# Altium PCB InactivityTracker_rev4_pcituremode.PcbDoc
Units mil, origin at the board's own origin, x right, y up, seen from the top; angles counter-clockwise.
Board outline 2480 x 865 mil, 2 copper layers (Top Layer, Bottom Layer); 68 components, 55 nets, 275 pads, 64 vias.
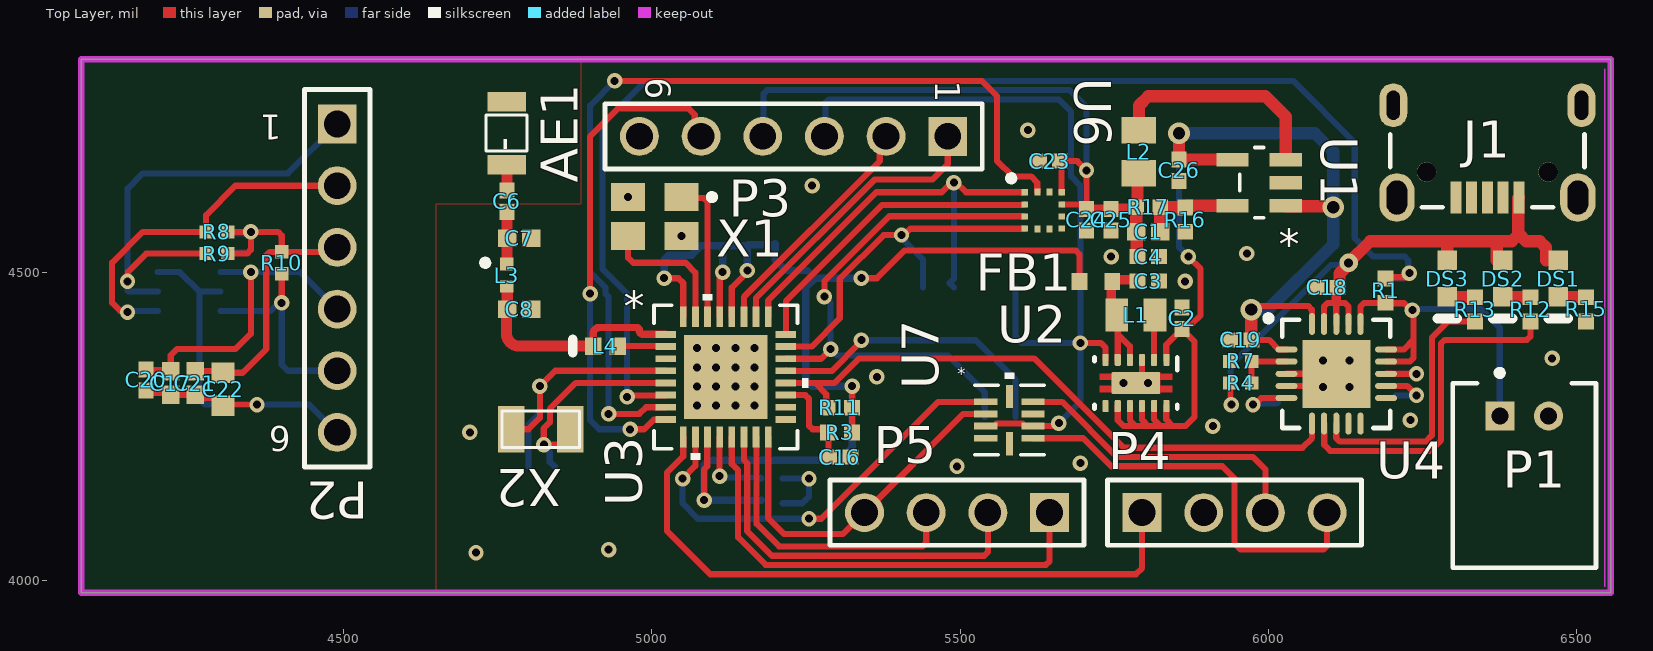
[diagram p0: Top Layer view]
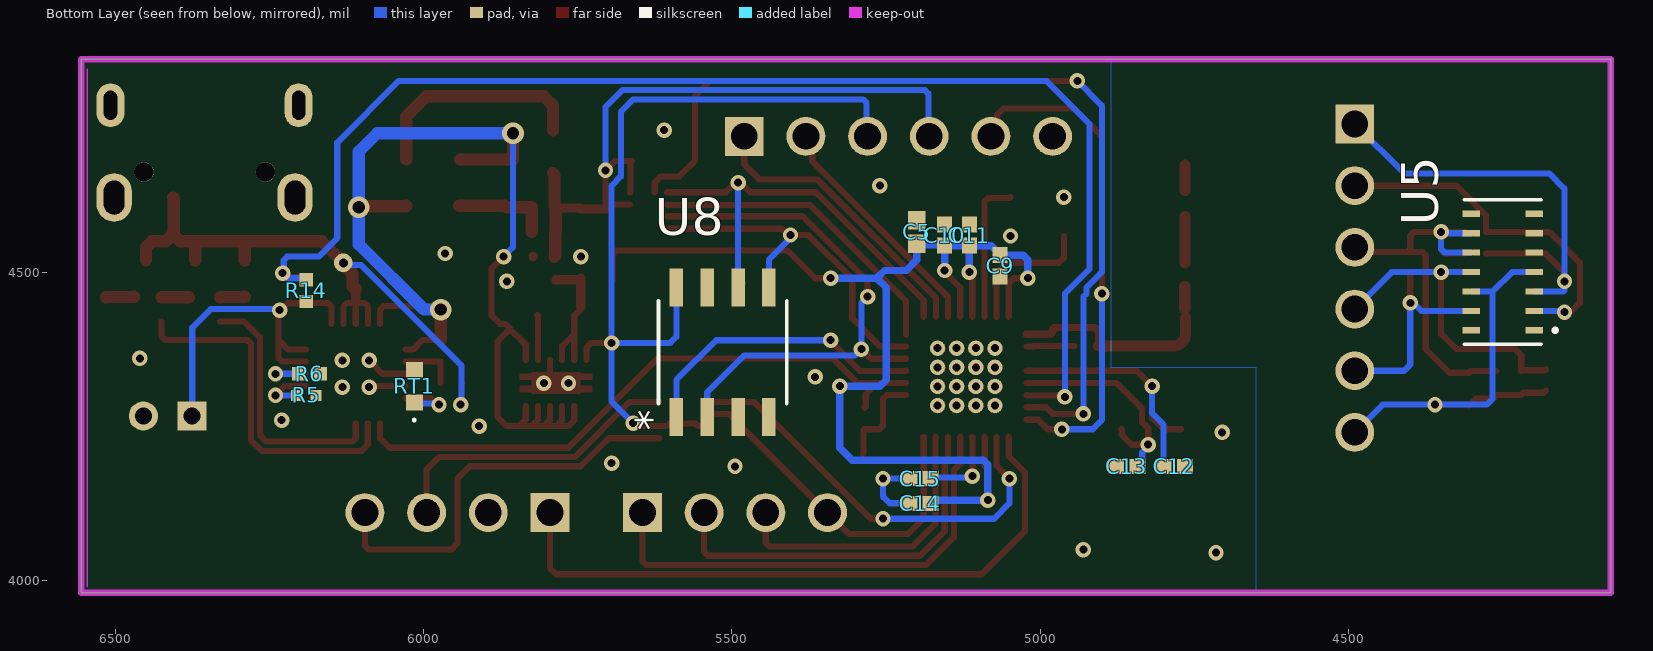
[diagram p1: Bottom Layer view, seen from below]

## Layer stack, top to bottom
Top Solder: solder mask 0.4, Solder Resist, Dk 3.5
Top Layer: signal copper 1.4
Dielectric 1: dielectric 12.6, FR-4, Dk 4.8
Bottom Layer: signal copper 1.4
Bottom Solder: solder mask 0.4, Solder Resist, Dk 3.5

## Board outline
4075,3980 4075,4845 6555,4845 6555,3980
cut-out: 6545,4830 6545,3990
cut-out: 6995,5000

## Design rules (kind name [scope] priority, off if disabled: settings)
Clearance [All] p1: gap=5 ignorepadtopadclearanceinfootprint=TRUE
ComponentClearance [All] p1: gap=6 collisioncheckmode=3 verticalgap=10 showdistances=FALSE
HoleSize [All] p1: absolutevalues=TRUE maxlimit=248.03 minlimit=11.81 maxpercent=80.000 minpercent=20.000
MinimumAnnularRing [All] p1: minimumring=6
MinimumSolderMaskSliver [All] p1 off: minsoldermaskwidth=6
PasteMaskExpansion [All] p1 off: expansion=0
PlaneConnect [All] p1: planeconnectstyle=Direct reliefexpansion=20 reliefentries=4 reliefconductorwidth=10 reliefairgap=10
PolygonConnect [All] p1: connectstyle=Direct reliefconductorwidth=10 reliefentries=4 polygonreliefangle="90 Angle" airgapwidth=10
RoutingVias [All] p1: holewidth=15 width=30 viastyle="Through Hole" minholewidth=11.81 minwidth=8 maxholewidth=248.03 maxwidth=50
SilkToSilkClearance [All] p1: silktosilkclearance=6
SilkToSolderMaskClearance [IsPad] p1: minsilkscreentomaskgap=6 clearancetoexposedcopper=TRUE
SolderMaskExpansion [All] p1 off: expansion=4 istentingtop=FALSE
Width [All] p1: maxlimit=20 minlimit=3 preferedwidth=10
23 further rules are at their usual default settings.

## Components (designator, comment, footprint, x,y, rotation, side; value= is the part's Value field where it differs from the comment)
AE1 "2450AT18B100E" ANT_2450AT18B100E 4765,4725 r90 top
C1 "100pF" CAPC1005X55X25ML05T10 5805,4565 r180 top
C2 "10uF" CAPC1005X55X25NL05T10 5860.16,4425.16 r90 top
C3 "10uF" CAPC1005X55X25NL05T10 5805.16,4485.16 r0 top
C4 "10uF" CAPC1005X55X25NL05T10 5805,4525 r0 top
C5 "2.2uF" CAPC1005X55X25ML05T10 5200,4565 r90 bottom
C6 "12pF" CAPC1005X55X25NL05T10 4765,4615 r270 top
C7 "1.2pF" CAPC1005X55X25ML05T10 4785,4555 r180 top
C8 "1.2pF" CAPC1005X55X25ML05T10 4785,4440 r180 top
C9 "100nF" CAPC1005X55X25NL05T10 5065,4510 r270 bottom
C10 "100nF" CAPC1005X55X25NL05T10 5155,4560 r270 bottom
C11 "100nF" CAPC1005X55X25NL05T10 5115,4560 r270 bottom
C12 "12pF" CAPC1005X55X25NL05T10 4782.68,4185 r0 bottom
C13 "12pF" CAPC1005X55X25NL05T10 4860,4185 r180 bottom
C14 "100nF" CAPC1005X55X25NL05T10 5195,4125 r180 bottom
C15 "1uF" CAPC1005X55X25NL5T10 5195,4165 r0 bottom
C16 "100nF" CAPC1005X55X25NL05T10 5305,4200 r180 top
C17 "0.1uF" CAPC1005X55X25ML05T10 4220,4320 r270 top
C18 "10uF" CAPC1005X55X25NL05T10 6095,4475 r180 top
C19 "4.7uF" CAPC1005X55X25NL05T10 5955,4390 r180 top
C20 "4.7uF" CAPC1005X55X25NL05T10 4180,4325 r270 top
C21 "0.1uF" CAPC1005X55X25ML05T10 4260,4320 r270 top
C22 "10uF" CAPC1608X90X35NL10T15 4305,4310 r270 top
C23 "100nF" CAPC1005X55X25NL05T10 5645,4680 r0 top
C24 "10uF" CAPC1005X55X25NL05T10 5705,4585 r270 top
C25 "100nF" CAPC1005X55X25NL05T10 5745,4585 r90 top
C26 "4.7uF" CAPC1005X55X25NL05T10 5855,4665 r270 top
DS1 "GREEN" LITE-ON-LTST-C190GKT-2_V 6470,4489.53 r270 top
DS2 "GREEN" LITE-ON-LTST-C190GKT-2_V 6380,4489.53 r270 top
DS3 "YELLOW" LITE-ON-LTST-C190GKT-2_V 6290,4489.53 r270 top
FB1 "BLM18HE152SN1D" MURA-BLM18-RF-H4-CHIP-2_V 5720,4485 r0 top
J1 "629105150521" 629105150521 6355,4735 r180 top
L1 "2.2uH" MURA-IND0805_H_0.55_L 5785.16,4430.16 r180 top
L2 "3.3uH" INDC2012X100N 5790,4695 r270 top
L3 "2nH" MURA-IND0402_V 4765,4495 r90 top
L4 "15nH" INDC1005X55X25ML05T10_A 4925,4380 r0 top
P1 "S2B-PH-K-S(LF)(SN)" JST-S2B-PH-K-S_V 6415,4170 r0 top
P2 "61300611121" 61300611121 4490,4490 r270 top
P3 "61300611121" 61300611121 5230,4720 r180 top
P4 "61300411121" 61300411121 5945,4110 r0 top
P5 "61300411121" 61300411121 5495,4110 r180 top
R1 "100K" RESC1005X40X25ML05T05 6190,4470 r90 top
R3 "100k" RESC1005X40X25ML05T05 5305,4240 r0 top
R4 "330k" RESC1005X40X25NL05T05 5955,4320 r0 top
R5 "47k" RESC1005X40X25LL05T05 6190,4300 r180 bottom
R6 "88.7k" RESC1005X40X25NL05T05 6185,4335 r0 bottom
R7 "110k" RESC1005X40X25NL05T05 5955,4355 r180 top
R8 "1K" RESC1005X40X25NL05T05 4295,4565 r0 top
R9 "1K" RESC1005X40X25NL05T05 4295,4530 r0 top
R10 "1K" RESC1005X40X25NL05T05 4400,4515 r270 top
R11 "100k" RESC1005X40X25ML05T05 5305,4280 r0 top
R12 "470" RESC1005X40X25ML05T05 6425,4439.53 r270 top
R13 "470" RESC1005X40X25ML05T05 6335,4439.53 r270 top
R14 "249K" RESC1005X40X25NL05T05 6190,4470 r270 bottom
R15 "470" RESC1005X40X25ML05T05 6515,4439.53 r270 top
R16 "100k" RESC1005X40X25ML05T05 5865,4585 r90 top
R17 "200k" RESC1005X40X25ML05T05 5805,4605 r180 top
RT1 "10k" MURA-NCP18XH103F03RB-2_V 6015,4315 r90 bottom
U1 "SP6669AEK-L/TRR3" SOT-23-5_VAR-AA 5985,4645 r180 top value=Value
U2 "TPS62740DSSR" DSS0012A_V 5785.16,4320.16 r270 top
U3 "CC2640F128RHBT" RHB32_3P45X3P45 5120,4330 r0 top value=Value
U4 "MCP73871-2CCI/ML" QFN-ML20_M 6110,4335 r0 top
U5 "MAX30102EFD+" 21-0880B-L 4250,4500 r0 bottom
U6 "LIS2HH12TR" STM-LGA-12 5635.02,4599.84 r0 top
U7 "DRV2603RUNR" RUN10 5580,4260 r0 top value=Value
U8 "MX25R3235FM1IL0" SOP_8L_150 5515,4370 r90 bottom value=Value
X1 "24.0000Mhz" EPSON-TSX-3225_V 5005,4590 r180 top
X2 "32.768kHz" XTAL320X150X75 4820,4245 r0 top

## Footprints (in the part's own frame and the unit in brackets; to place one, negate y for a bottom-side part, rotate by r counter-clockwise, add the part's x,y. Pads: shape width x height; smd on the part's side, far side on the other; paste and mask are expansions set on the pad)
21-0880B-L [mil]
  rect 28x10 smd paste+0 mask+0: 1(-51,94.49) 2(-51,62.99) 3(-51,31.5) 4(-51,0) 5(-51,-31.5) 6(-51,-62.99) 7(-51,-94.49) 8(51,-94.49) 9(51,-62.99) 10(51,-31.5) 11(51,0) 12(51,31.5) 13(51,62.99) 14(51,94.49)
  silkscreen extent -88,-117 62,117, body extent -57,-112 57,112, height 51
61300411121 [mm] "Pin Header, pitch 2.54 mm, THT, Vertical, single row, 4p"
  rect 1.6x1.6 hole 1.1: 1(-3.81,0)
  round 1.6 hole 1.1: 2(-1.27,0) 3(1.27,0) 4(3.81,0)
  silkscreen extent -5.23,-1.35 5.23,1.35, body extent -5.08,-1.27 5.08,1.27, height 8.57
61300611121 [mm] "Pin Header, pitch 2.54 mm, THT, Vertical, single row, 6p"
  rect 1.6x1.6 hole 1.1: 1(-6.35,0)
  round 1.6 hole 1.1: 2(-3.81,0) 3(-1.27,0) 4(1.27,0) 5(3.81,0) 6(6.35,0)
  silkscreen extent -7.77,-1.35 7.77,1.35, body extent -7.62,-1.27 7.62,1.27, height 8.57
629105150521 [mm] "Micro USB 2.0 SMT Type B Horizontal 5 Contacts High Current"
  rect 0.45x1.3 smd: 1(-1.3,2.9) 2(-0.65,2.9) 3(0,2.9) 4(0.65,2.9) 5(1.3,2.9)
  round 0.8 hole 0.8 unplated: MH1(-2.5,1.85) MH2(2.5,1.85)
  oval 1.15x1.8 hole 0.55 slot 1.2 at 90 deg: Shell(-3.875,-0.9) Shell(3.875,-0.9)
  oval 1.45x2 hole 0.85 slot 1.4 at 90 deg: Shell(-3.725,2.9) Shell(3.725,2.9)
  silkscreen extent -4,0.3 4,3.3, body extent -4,-3.3 4,3.3, height 2.75
ANT_2450AT18B100E [mm]
  rect 0.8x1.6 smd: 1(-1.3,0) 2(1.3,0)
  silkscreen extent -0.73,-0.84 0.75,0.86, body extent -1.6,-0.7 1.6,0.7, height 0.8
CAPC1005X55X25ML05T10 [mm] "Chip Capacitor, 2-Leads, Body 1.00x0.50mm, IPC Low Density"
  rect 0.76x0.72 smd: 1(-0.49,0) 2(0.49,0)
  body extent -0.53,-0.28 0.53,0.27, height 0.55
CAPC1005X55X25NL05T10 [mm] "Chip Capacitor, 2-Leads, Body 1.00x0.50mm, IPC Medium Density"
  rect 0.66x0.62 smd: 1(-0.44,0) 2(0.44,0)
  body extent -0.53,-0.28 0.53,0.27, height 0.55
CAPC1005X55X25NL5T10 [mm] "Chip Capacitor, 2-Leads, Body 1.05x0.55mm, IPC Medium Density"
  rect 0.66x0.62 smd: 1(-0.44,0) 2(0.44,0)
  body extent -0.52,-0.28 0.52,0.27, height 0.55
CAPC1608X90X35NL10T15 [mm] "Chip Capacitor, 2-Leads, Body 1.60x0.80mm, IPC Medium Density"
  rect 0.85x0.95 smd: 1(-0.675,0) 2(0.675,0)
  body extent -0.85,-0.45 0.85,0.45, height 0.9
DSS0012A_V [mm] "SON, 12-Leads, Body 2x3mm, Pitch 0.5mm, Thermal Pad 2x0.9mm, TI Recommended"
  rrect40% 0.5x0.25 smd: 1(-0.95,1.25) 2(-0.95,0.75) 3(-0.95,0.25) 4(-0.95,-0.25) 5(-0.95,-0.75) 6(-0.95,-1.25) 7(0.95,-1.25) 8(0.95,-0.75) 9(0.95,-0.25) 10(0.95,0.25) 11(0.95,0.75) 12(0.95,1.25)
  rrect11% 0.9x2 smd paste-0.45: 13(0,0)
  Top Layer region: -0.375,-1.5 -0.375,-1 -0.45,-1 -0.45,1 -0.375,1 -0.375,1.5 -0.125,1.5 -0.125,1 0.125,1 0.125,1.5 0.375,1.5 0.375,1 0.45,1 0.45,-1 0.375,-1 0.375,-1.5 0.125,-1.5 0.125,-1 -0.125,-1 -0.125,-1.5
  silkscreen extent -1.05,-1.7 1.05,1.7, body extent -1,-1.5 1,1.5, height 0.8
EPSON-TSX-3225_V [mm] "SMD, 4-Leads, Body 3.2x2.5mm"
  rect 1.4x1.15 smd: 1(-1.1,-0.8) 2(1.1,-0.8) 3(1.1,0.8) 4(-1.1,0.8)
  silkscreen extent -2.48,-0.92 -2.23,-0.68, body extent -1.6,-1.25 1.6,1.25, height 0.6
INDC1005X55X25ML05T10_A [mm] "Chip Inductor, 2-Leads, Body 1.05x0.55mm, IPC Low Density"
  rect 0.69x0.72 smd: 1(-0.505,0) 2(0.505,0)
  silkscreen extent -1.35,-0.28 -1.35,0.28, body extent -0.52,-0.28 0.53,0.28, height 0.55
INDC2012X100N [mm]
  rect 1.1x1.42 smd: 1(-0.885,0) 2(0.885,0)
JST-S2B-PH-K-S_V [mm] "THD, 2-Leads, Body 7.6x5.9mm, Pitch 2mm"
  rect 1.2x1.2 hole 0.7: 1(-1,2.45)
  round 1.2 hole 0.7: 2(1,2.45)
  silkscreen extent -2.95,-3.8 2.95,4.35, body extent -2.95,-3.8 2.95,3.8, height 4.8
LITE-ON-LTST-C190GKT-2_V [mm] "Chip, 2-Leads, Body 1.6x0.8mm"
  rect 0.8x0.8 smd: 1(-0.75,0) 2(0.75,0)
  silkscreen extent 1.65,-0.4 1.65,0.4, body extent -0.8,-0.4 0.8,0.4, height 0.8
MURA-BLM18-RF-H4-CHIP-2_V [mm] "Chip Ferrite Bead, 2-Leads, Body 1.6x0.8mm, Height 0.95mm, Reflow"
  rect 0.65x0.7 smd: 1(-0.675,0) 2(0.675,0)
  body extent -0.8,-0.4 0.8,0.4, height 0.95
MURA-IND0402_V [mm] "SMT Inductor, 2 Leads, Body 1x0.5 mm"
  rect 0.525x0.55 smd: 1(0.463,0) 2(-0.462,0)
  silkscreen extent 0.38,0.76 0.63,1.01, body extent -0.5,-0.25 0.5,0.25, height 0.55
MURA-IND0805_H_0.55_L [mm] "Chip Inductor, 2-Leads, Body 2.2x1.45mm, IPC High Density"
  rect 0.93x1.37 smd: 1(-0.785,0) 2(0.785,0)
  body extent -1.1,-0.72 1.1,0.72, height 0.55
MURA-NCP18XH103F03RB-2_V [mm] "Chip, 2-Leads, Body 1.6x0.8mm"
  rect 0.65x0.7 smd: 1(-0.675,0) 2(0.675,0)
  silkscreen extent -1.45,-0.05 -1.35,0.05, body extent -0.8,-0.4 0.8,0.4, height 0.8
QFN-ML20_M [mm] "QFN, 20-Leads, Body 4x4mm, Pitch 0.5mm, Thermal Pad 2.8x2.8mm, IPC Low Density"
  oval 0.9x0.25 smd: 1(-2.05,1) 2(-2.05,0.5) 3(-2.05,0) 4(-2.05,-0.5) 5(-2.05,-1) 11(2.05,-1) 12(2.05,-0.5) 13(2.05,0) 14(2.05,0.5) 15(2.05,1)
  oval 0.25x0.9 smd: 6(-1,-2.05) 7(-0.5,-2.05) 8(0,-2.05) 9(0.5,-2.05) 10(1,-2.05) 16(1,2.05) 17(0.5,2.05) 18(0,2.05) 19(-0.5,2.05) 20(-1,2.05)
  rect 2.8x2.8 smd: 21(0,0)
  silkscreen extent -2.92,-2.22 2.23,2.41, body extent -2.07,-2.07 2.08,2.08, height 1
RESC1005X40X25LL05T05 [mm] "Chip Resistor, 2-Leads, Body 1.00x0.50mm, IPC High Density"
  rect 0.45x0.45 smd: 1(-0.4,0) 2(0.4,0)
  body extent -0.53,-0.27 0.53,0.28, height 0.4
RESC1005X40X25ML05T05 [mm] "Chip Resistor, 2-Leads, Body 1.05x0.55mm, IPC Low Density"
  rect 0.65x0.65 smd: 1(-0.5,0) 2(0.5,0)
  body extent -0.53,-0.28 0.53,0.28, height 0.4
RESC1005X40X25NL05T05 [mm] "Chip Resistor, 2-Leads, Body 1.00x0.50mm, IPC Medium Density"
  rect 0.55x0.55 smd: 1(-0.45,0) 2(0.45,0)
  body extent -0.53,-0.27 0.53,0.28, height 0.4
RHB32_3P45X3P45 [mm]
  rect 0.85x0.28 smd paste-0.14 mask+0: 1(-2.475,1.75) 2(-2.475,1.25) 3(-2.475,0.75) 4(-2.475,0.25) 5(-2.475,-0.25) 6(-2.475,-0.75) 7(-2.475,-1.25) 8(-2.475,-1.75) 17(2.475,-1.75) 18(2.475,-1.25) 19(2.475,-0.75) 20(2.475,-0.25) 21(2.475,0.25) 22(2.475,0.75) 23(2.475,1.25) 24(2.475,1.75)
  rect 0.28x0.85 smd paste-0.14 mask+0: 9(-1.75,-2.475) 10(-1.25,-2.475) 11(-0.75,-2.475) 12(-0.25,-2.475) 13(0.25,-2.475) 14(0.75,-2.475) 15(1.25,-2.475) 16(1.75,-2.475) 25(1.75,2.475) 26(1.25,2.475) 27(0.75,2.475) 28(0.25,2.475) 29(-0.25,2.475) 30(-0.75,2.475) 31(-1.25,2.475) 32(-1.75,2.475)
  rect 3.45x3.45 smd paste-1.712 mask-1.714: 33(0,0)
  round 0.635 hole 0.33: V(-1.181,-1.181) V(-1.181,-0.394) V(-1.181,0.394) V(-1.181,1.181) V(-0.394,-1.181) V(-0.394,-0.394) V(-0.394,0.394) V(-0.394,1.181) V(0.394,-1.181) V(0.394,-0.394) V(0.394,0.394) V(0.394,1.181) V(1.181,-1.181) V(1.181,-0.394) V(1.181,0.394) V(1.181,1.181)
  silkscreen extent -2.96,-3.41 3.41,3.41, body extent -2.63,-2.63 2.63,2.63, height 1.4
RUN10 [mm]
  rect 0.95x0.28 smd paste-0.14: 1(-0.975,0.75) 2(-0.975,0.25) 3(-0.975,-0.25) 4(-0.975,-0.75) 6(0.975,-0.75) 7(0.975,-0.25) 8(0.975,0.25) 9(0.975,0.75)
  rect 0.28x0.95 smd paste-0.14: 5(0,-0.975) 10(0,0.975)
  silkscreen extent -1.43,-1.43 1.43,1.96, body extent -1.1,-1.1 1.1,1.1, height 0.6
SOP_8L_150 [mil]
  rect 62x22 smd paste+0 mask+0: 1(-105,75) 2(-105,25) 3(-105,-25) 4(-105,-75) 5(105,-75) 6(105,-25) 7(105,25) 8(105,75)
  silkscreen extent -84,-104 84,104, body extent 0,0 10,10, height 10
SOT-23-5_VAR-AA [mil]
  rect 52x22 smd mask+0: 1(-43,37.4) 2(-43,0) 3(-43,-37.4) 4(43,-37.4) 5(43,37.4)
  silkscreen extent -7,-57 32,57, body extent 0,0 10,10, height 10
STM-LGA-12 [mm] "LGA, 12-Leads, Body 2x2mm, Pitch 0.5mm"
  rect 0.275x0.25 smd: 1(-0.763,0.75) 2(-0.763,0.25) 3(-0.763,-0.25) 4(-0.763,-0.75) 7(0.763,-0.75) 8(0.763,-0.25) 9(0.763,0.25) 10(0.763,0.75)
  rect 0.25x0.275 smd: 5(-0.25,-0.762) 6(0.25,-0.762) 11(0.25,0.763) 12(-0.25,0.763)
  silkscreen extent -1.45,1.2 -1.2,1.45, body extent -1,-1 1,1, height 1
XTAL320X150X75 [mil]
  rect 43x75 smd: 1(-48,0) 2(48,0)
  silkscreen extent -63,-30 63,30

## Part data
AE1: "JOHANSON TECHNOLOGY - 2450AT18B100E - ANTENNA, CERAMIC, 2.45GHZ", Case/Package=CSMD, Frequency=2.45GHz, Manufacturer=Johanson, Max Frequency=2.5GHz, Max Operating Temperature=85°C, Max Power Dissipation=3W, Min Operating Temperature=-40°C, Package Quantity=1, Supplier Part Number 1=712-1006-1-ND, Bandwidth=100MHz, Category="RF Antennas", ComponentLink1Description=https://datasheet.ciiva.com/24025/antenna-2450at18b100-242422-24025839.pdf?src-supplier=Mouser, ComponentLink1URL=https://datasheet.ciiva.com/24025/antenna-2450at18b100-242422-24025839.pdf?src-supplier=Mouser, ComponentLink2Description=https://datasheet.ciiva.com/1124/1318299-1124918.pdf?src-supplier=Element14, ComponentLink2URL=https://datasheet.ciiva.com/1124/1318299-1124918.pdf?src-supplier=Element14, Contact Plating=Tin, Gain=-0.5dB, Height=0.051inch, Impedance=50R, Length=3.2mm, Manufacturer Part Number=2450AT18B100E, Mount="Surface Mount", Number of Bands=1, Packaging="Tape and Reel", Power Rating=3W, Pricing 1="1=0.56000, 10=0.49500, 25=0.46520, 100=0.37950, 250=0.35252, 500=0.30000, 1000=0.24000 (USD)", Radiation Hardening=No, REACH SVHC="No SVHC", Return Loss=-9.5dB, RoHS=Yes, Stock 1=218439, Supplier 1=Digi-Key, Termination=Solder, Width=1.6mm
C1: library part CMP-2008-04249-1, Manufacturer=Murata, Part Number=GRM1555C1H101GA01D
C2 C3 C4 C18 C24: library part CMP-2008-04556-1, Manufacturer=Murata, Part Number=GRM155R61A105KE15D
C5: library part CMP-2008-04543-1, Manufacturer=Murata, Part Number=GRM155R60J225ME15D
C6 C12 C13: library part CMP-2008-04258-1, Manufacturer=Murata, Part Number=GRM1555C1H120JA01D
C7 C8: library part CMP-2008-04281-1, Manufacturer=Murata, Part Number=GRM1555C1H1R2CA01D
C9 C10 C11 C14 C16 C23 C25: library part CMP-2008-04639-1, Manufacturer=Murata, Part Number=GRM155R71H104KE14D
C15: library part CMP-1662-00020-1, "Chip Capacitor, 1 uF, +/- 10%, 6.3 V, -55 to 85 degC, 0402 (1005 Metric), RoHS, Tape and Reel", Capacitance="1 uF", Case Code (Imperial)=0402, Case Code (Metric)=1005, Max Operating Temperature="85 degC", Min Operating Temperature="-55 degC", Package Quantity=10000, PartNumber=GRM155R60J105KE19D, Tolerance=10%, Type (Capacitors)=X5R, Voltage Rating="6.3 V", Voltage Rating (DC)="3 V", Case/Package=0402, ComponentLink1Description="Manufacturer URL", ComponentLink1URL=http://www.murata.com/, ComponentLink2Description=Datasheet, ComponentLink2URL=http://psearch.en.murata.com/capacitor/product/GRM155R60J105KE19%23.pdf, DatasheetVersion=08/2016, Height="0.5 mm", Length="1 mm", Mount="Surface Mount", Mounting Technology="Surface Mount", PackageDescription="2-Pin Surface Mount Device, Body 1 x 0.5 mm", Packaging="Tape and Reel", Pins=2, Radiation Hardening=No, REACH SVHC="No SVHC", RoHSCompliant=true, Width="0.5 mm"
C17 C21: library part CMP-2100-03641-1, "Chip Capacitor, 0.1 uF, +/- 10%, 16 V, -55 to 125 degC, 0402 (1005 Metric), RoHS, Tape and Reel", Capacitance=100nF, Case Code (Imperial)=0402, Case Code (Metric)=1005, Dielectric=X7R, Dielectric Material=Ceramic, Insulation Resistance=10GR, Manufacturer=Murata, Max Operating Temperature=125degC, Min Operating Temperature=-55degC, Package Description="2-Pin Surface Mount Device, Body 1 x 0.5 mm", Package Quantity=1, Tolerance=10%, Voltage=16V, Case/Package=0402, Datasheet URL=http://psearch.en.murata.com/capacitor/product/GRM155R71C104KA88%23.pdf, Datasheet Version=42675.0, Depth=0.5mm, Height=0.5mm, Lead Free=LeadFree, Length=1mm, Manufacturer URL=http://www.murata.com/, Material=Ceramic, Mount=SurfaceMount, Number of Pins=2, Package Reference=0402, Packaging=TapeandReel, Radiation Hardening=No, REACH SVHC=NoSVHC, RoHSCompliant=true, Termination=SMD/SMT, Thickness=0.022inch, Voltage Rating=16V, Voltage Rating (DC)=16V, Width=0.5mm
C19 C26: library part CMP-2008-03967-1, Manufacturer=Murata, Part Number=GRM155R61C102KA01D
C20: library part CMP-2008-04549-1, Manufacturer=Murata, Part Number=GRM155R60J475ME47D
C22: library part CMP-2006-02792-1, Manufacturer=Murata, Part Number=GRM188R60J106ME47D
DS1 DS2 DS3: library part CMP-2000-05197-1, "LED Uni-Color Green, 75 mW, 5 V, -30 to 85 degC, 2-Pin SMD, RoHS, Tape and Reel", Emitting Color=YellowGreen, Forward Current=30mA, Forward Voltage=2.4V, Manufacturer=Lite-On, Operating Temp Range=-55Cto85C, Operating Temperature Classification=Industrial, Package Description="2-Pin Surface Mount Device, Body 1.6 x 0.8 mm", Package Reference=C190KGKT, Package Type=ChipLed, Power Dissipation=75W, Reverse Voltage=5V, Test Current (It)=20mA, Chip Material=AlGaInP, Datasheet URL=http://datasheet.octopart.com/LTST-C190KGKT-Lite-On-datasheet-43775815.pdf, Datasheet Version=Jul-15, DELETED=Compliant, Dominant Wave Length=571nm, High Brightness=Yes, Lens Dimensions=1.1X0.8X0.52mm, Lum Intensity=35mcd, Luminous Intensity=35mcd, Main Category=ChipLED, Manufacturer URL=http://www.us.liteon.com/, Mounting=SurfaceMount, Number of Elements=1, Packaging=TapeandReel, Peak Wavelength=574nm, Pin Count=2, Product Depth (mm)=0.8mm, Product Height (mm)=0.8mm, Product Length (mm)=1.6mm, Rad Hardened=No, Shape Type=Rectangular, Type=Uni-Color, Viewing Angle=130deg
FB1: library part CMP-0686-00368-2, "Chip Ferrite Bead for GHz Band High-speed Signal Lines, 1500 Ohm, 500 mA, -55 to 125 degC, 1.6 x 0.8 x 0.95 mm SMD, Tape and Reel", DC Resistance="0.50 Ohm Max.", Manufacturer=Murata, Operating Temperature Range="-55 to 125 degC", Rated Current="500 mA", ComponentLink1Description="Manufacturer URL", ComponentLink1URL=http://www.murata.com/, ComponentLink2Description=Datasheet, ComponentLink2URL=http://www.murata.com/products/catalog/pdf/c31e.pdf, ComponentLink3Description="Package Specification", ComponentLink3URL=http://www.murata.com/products/catalog/pdf/c31e.pdf, DatasheetVersion=08/2013, Impedance (at 100 MHz)="1500 Ohm +/- 25%", Mounting Technology="Surface Mount", PackageDescription="2-Pin Chip, Body 1.6 x 0.8 mm", PackageReference=BLM18_H950-2, Packing="Tape and Reel", PartNumber=BLM18HE152SN1D
J1: library part CMP-1502-03252-1, "Micro USB 2.0 Type B Receptacle WR-COM, Horizontal, SMT, with Pegs, High Current at Pin 1 & Pin 5", Contact Resistance=30mOhm, Manufacturer="Wurth Elektronik", Operating Temperature=-40to85degC, Rated Current=3A, Working Voltage=30VAC, Connector Type=MicroUSB2.0TypeB, Datasheet URL=https://katalog.we-online.de/em/datasheet/629105150521.pdf, Gender=Receptacle, Manufacturer URL=http://www.we-online.de, Mounting Technology=SMT, Orientation=Horizontal, Package Reference=629105150521, Packaging=TapeandReel, Part Number=629105150521, Publisher=WurthElektronik
L1: library part CMP-2000-06589-1, "Chip Inductor, 1.0 uH, +/- 20%, -55 to 125 degC, 2-Pin SMD (0805), RoHS, Tape and Reel", Case Size/Dimension=0805, DC Resistance=0.19, Inductance-Nom=1H, Manufacturer=Murata, Package Description="2-Pin Surface Mounted Device, Body 2 x 1.25 mm", Rated Current-Max=800mA, Tolerance (%)=20%, Datasheet URL=https://datasheet.ciiva.com/3866/336lqm21pn1r0mc023-3866307.pdf, Datasheet Version=07/2014, Manufacturer URL=http://www.murata.com/, Mounting Technology=SurfaceMount, Package Reference=0805
L2: library part LQM21PN3R3NGRD, "Inductor with Inductance: 3.3uH Tol. +/-30%, Package: 0805 _2012_", Package="2012 Murata", Digi-Key_Part_Number=490-11718-1-ND, Digi-Key_Purchase_URL=https://www.digikey.com/product-detail/en/murata-electronics/LQM21PN3R3NGRD/490-11718-1-ND/5333558?utm_source=snapeda&utm_medium=aggregator&utm_campaign=symbol, MF=Murata, MP=LQM21PN3R3NGRD, SnapEDA_Link=https://www.snapeda.com/parts/LQM21PN3R3NGRD/Murata%20Electronics%20North%20America/view-part/1523369/?ref=snap
L3: library part CMP-0499-00001-3, "Chip Inductor (Chip Coil) for High Frequency Multilayer, 2 +/- 0.3 nH, 300 mA, 0402 (1005), 180mm Paper Tape", Inductance="2.0 nH +/- 0.3 nH", Inductance Test Frequency="100 MHz", Manufacturer=Murata, Max. Of DC Resistance="0.1 ohm", Operating Temperature Range="-55 to 125 degC", PartNumber=LQG15HS2N0S02D, Rated Current (Itemp) (Based on Temperature rise)="300 mA", Self Resonance Frequency (min.)="6000 MHz", ComponentLink1Description="Manufacturer URL", ComponentLink1URL=http://www.murata.com/, ComponentLink2Description=Datasheet, ComponentLink2URL=http://search.murata.co.jp/Ceramy/image/img/PDF/ENG/L0075S0083LQG15HS.pdf, ComponentLink3Description="Package Specification", ComponentLink3URL=http://search.murata.co.jp/Ceramy/image/img/PDF/ENG/L0075S0083LQG15HS.pdf, Mounting Technology="Surface Mount", PackageDescription="2-Pin SMT Inductor, 1 x 0.5 mm Body", PackageReference=IND0402, Q (min.)=8, Q Test Frequency="100 MHz", RoHS=Yes
L4: library part CMP-2100-03652-1, "Chip Inductor, 15 nH, +/- 5%, 100 MHz, -55 to 125 degC, 0402 (1005 Metric), RoHS, Paper Tape", Case Code (Imperial)=0402, Case Code (Metric)=1005, Current Rating=300mA, DC Resistance (DCR)=320mOhm, Inductance=15nh, Manufacturer=Murata, Max Operating Temperature=125degC, Min Operating Temperature=-55degC, Package Description="2-Pin Surface Mount Device, Body 1 x 0.5 mm", Package Quantity=10000, Self Resonant Frequency=2.5GHz, Test Frequency=100MHz, Tolerance=5%, Case/Package=0402, Core Material=Air, Datasheet URL=http://psearch.en.murata.com/inductor/product/LQG15HS15NJ02_.pdf, Datasheet Version=42675.0, DC Current=300mA, Depth=0.55mm, Height=0.5mm, Height - Seated (Max)=0.022inch, Lead Free=LeadFree, Length=1mm, Manufacturer URL=http://www.murata.com/, Max DC Current=300mA, Military Standard=Not, Package Reference=0402, Packaging=TapeandReel, Q Factor=8, Radiation Hardening=No, RoHSCompliant=true, Shielding=Unshielded, Termination=SMD/SMT, Width=0.02inch
P1: library part CMP-1755-00004-1, "Male Header, Pitch 2 mm, 1 x 2 Position, Height 4.8 mm, Tail Length 3.4 mm, -25 to 85 degC, RoHS, Bulk", Capacitance="10 uF", Case\Package=Radial, Max Operating Temperature="85 degC", Min Operating Temperature="-40 degC", Package Quantity=200, Tolerance=20%, Voltage Rating="50 V", ComponentLink1Description=Datasheet, ComponentLink1URL=http://www.jst-mfg.com/product/pdf/eng/ePH.pdf, DatasheetVersion=Dec-12, Diameter="5 mm", Height="11 mm", Lead Pitch="2 mm", Length="11 mm", Mount="Through Hole", PackageDescription="Male Header, Pitch 2 mm, 1 x 2 Position, Height 4.8 mm, Tail Length 3.4 mm", PackageReference=S2B-PH-K-S, Packaging=Bulk, Pins=2, Radiation Hardening=No, REACH SVHC="No SVHC", RoHSCompliant=true, Voltage Rating (DC)="50 V"
P2 P3: library part CMP-1502-01070-1, "THT Vertical Pin Header WR-PHD, Pitch 2.54 mm, Single Row, 6 pins", Contact Resistance=20mOhm, Manufacturer="Wurth Elektronik", Operating Temperature=-40to105degC, Rated Current=3A, Withstanding Voltage=500VAC, Working Voltage=250VAC, Datasheet URL=https://katalog.we-online.de/em/datasheet/6130xx11121.pdf, Gender=Male, Manufacturer URL=http://www.we-online.de, Mounting Technology=THT, Orientation=Vertical, Package Reference=61300611121, Packaging=Bag, Part Number=61300611121, Pin Number=6, Pitch=2.54mm, Publisher=WurthElektronik, Row Number=Single
P4 P5: library part CMP-1502-01064-1, "THT Vertical Pin Header WR-PHD, Pitch 2.54 mm, Single Row, 4 pins", Contact Resistance=20mOhm, Manufacturer="Wurth Elektronik", Operating Temperature=-40to105degC, Rated Current=3A, Withstanding Voltage=500VAC, Working Voltage=250VAC, Datasheet URL=https://katalog.we-online.de/em/datasheet/6130xx11121.pdf, Gender=Male, Manufacturer URL=http://www.we-online.de, Mounting Technology=THT, Orientation=Vertical, Package Reference=61300411121, Packaging=Bag, Part Number=61300411121, Pin Number=4, Pitch=2.54mm, Publisher=WurthElektronik, Row Number=Single
R1 R3 R11 R16: library part CMP-2002-08123-2, "Chip Resistor, 100 KOhm, +/- 1%, 0.63 W, -55 to 155 degC, 0402 (1005 Metric), RoHS, Tape and Reel", Case Code (Imperial)=0402, Case Code (Metric)=1005, Max Operating Temperature="155 degC", Min Operating Temperature="-55 degC", Package Quantity=10000, Power Rating="63 mW", Resistance="100 kohm", Tolerance=1%, Type (Resistor)="Thick Film", Voltage Rating="50 V", Case\Package=0402, ComponentLink1Description="Manufacturer URL", ComponentLink1URL=http://www.vishay.com/, ComponentLink2Description=Datasheet, ComponentLink2URL=http://www.vishay.com/docs/20035/dcrcwe3.pdf, DatasheetVersion=06/2012, Height="0.35 mm", Length="1 mm", Mount="Surface Mount", Mounting Technology="Surface Mount", PackageDescription="2-Pin Surface Mount Device, Body 1 x 0.5 mm", PackageReference=0402, Packaging="Tape and Reel", Pins=2, Radiation Hardening=No, REACH SVHC=Unknown, RoHSCompliant=true, Weight="2.3E-05 oz", Width="0.5 mm"
R4: library part CMP-2002-08521-1, Manufacturer="Vishay Dale", Part Number=CRCW0402330KFKED
R5: library part CMP-2002-00026-1, Manufacturer="Vishay Dale", Part Number=CRCW040247K0JNED
R6: library part CMP-2002-00251-1, Manufacturer="Vishay Dale", Part Number=CRCW040288K7FKED
R7: library part CMP-2002-08148-1, Manufacturer="Vishay Dale", Part Number=CRCW0402110KFKED
R8 R9 R10: library part CMP-2002-08276-1, Manufacturer="Vishay Dale", Part Number=CRCW04021K00FKED
R12 R13 R15: library part CMP-2002-00023-1, Manufacturer="Vishay Dale", Part Number=CRCW0402470RJNED
R14: library part CMP-2002-08401-1, Manufacturer="Vishay Dale", Part Number=CRCW0402249KFKED
R17: library part CMP-2002-08351-1, Manufacturer="Vishay Dale", Part Number=CRCW0402200RFKED
RT1: library part CMP-2000-05271-1, "NTC Thermistor, 10 KOhm, +/- 1%, 0.1 W, -40 to 125 degC, 0603 (1608 Metric), RoHS, Tape and Reel", Manufacturer=Murata, Rated Current=310A, Resistance=10kO, Temperature Range=-40to+125degC, Tolerance (%)=±1%, B-constant=3434K, Datasheet URL=http://www.jameco.com/Jameco/Products/ProdDS/1870999.pdf, Datasheet Version=Apr-05, Manufacturer URL=http://www.murata.com/, Type=NTC
U1: "Buck Switching Regulator IC Positive Adjustable 0.6V 1 Output 600mA SC-74A, SOT-753", Built_By=EMA_Jessica, Copyright="Copyright (C) 2018 Accelerated Designs. All rights reserved", Manufacturer_Part_Number=SP6669AEK-L/TRR3, RefDes=RefDes, Type=DEV, Vendor=Exar
U2: library part CMP-0323-00572-2, "Step Down Converter For Low Power Applications, 2.2 to 5.5 V VIN, -40 to 85 degC, 12-Pin WSON (DSS), RoHS, Tape and Reel", PartNumber=TPS62740, Temperature Max="85 degC", Temperature Min="-40 degC", ComponentLink1Description="Manufacturer URL", ComponentLink1URL=http://www.ti.com/, ComponentLink2Description=Datasheet, ComponentLink2URL=http://www.ti.com/lit/ds/symlink/tps62740.pdf, ComponentLink3Description="Package Specification", ComponentLink3URL=http://www.ti.com/litv/pdf/mpds336b, DatasheetVersion=SLVSB02B, Mounting Technology="Surface Mount", PackageDescription="12-Pin Plastic Small Outline, Body 3 x 2 mm, Pitch 0.5 mm", PackageReference=DSS0012A, PackageVersion="4209244/C, 07/2011", Packing="Tape and Reel", RoHS=TRUE, VIN Max="5.5 V", VIN Min="2.2 V", VOUT Max="3.3 V", VOUT Min="1.8 V"
U3: "SimpleLink Wireless MCU", Built_By=EMA_Jessica, Copyright="Copyright (C) 2018 Accelerated Designs. All rights reserved", Manufacturer_Part_Number=CC2640F128RHBT, RefDes=RefDes, Type=DEV, Vendor="Texas Instruments"
U4: library part CMP-0133-00005-1, "Stand-Alone System Load Sharing and Li-Ion/Li-Polymer Battery Charge Management Controller, 4.2V, 20-Pin QFN, Industrial Temperature", DatasheetVersion="revB, May-2009", PackageDescription="20-Lead Plastic Quad Flat, No Lead Package (ML) - 4x4x0.9 mm Body [QFN]", PackageReference=QFN-ML20, PackageVersion="revBB, Aug-2009"
U5: "IC SENSOR OXIMETER/HEARTRATE", Manufacturer=Maxim, Max Operating Temperature=85°C, Max Supply Voltage=2V, Min Operating Temperature=-40°C, Min Supply Voltage=1.7V, Supplier Part Number 1=MAX30102EFD+-ND, Category="Decoders, Multiplexers", ComponentLink1Description=http://www.farnell.com/datasheets/2162814.pdf?src-supplier=Farnell, ComponentLink1URL=http://www.farnell.com/datasheets/2162814.pdf?src-supplier=Farnell, ComponentLink2Description=http://www.farnell.com/datasheets/2162814.pdf?src-supplier=Element14, ComponentLink2URL=http://www.farnell.com/datasheets/2162814.pdf?src-supplier=Element14, ComponentLink3Description=https://datasheets.maximintegrated.com/en/ds/MAX30102.pdf?src-supplier=Digi-Key, ComponentLink3URL=https://datasheets.maximintegrated.com/en/ds/MAX30102.pdf?src-supplier=Digi-Key, Manufacturer Part Number=MAX30102EFD+, Number of Pins=14, Pricing 1="1=9.76000, 10=8.81500, 25=8.40520, 100=7.29800, 500=6.35500, 1000=5.53500 (USD)", REACH SVHC="No SVHC", RoHS=Yes, Stock 1=798, Supplier 1=Digi-Key
U6: library part CMP-2000-07462-1, "MEMS Digital Output Motion Sensor: Ultra-Low-Power High-Performance 3-Axis \"Pico\" Accelerometer, 1.71 to 3.6 V, -40 to 85 degC, 12-Pin LGA, RoHS, Tape and Reel", Case\/Package=LGA, Manufacturer=STMicroelectronics, Max Operating Temperature=85degC, Min Operating Temperature=-40degC, Package Description="12-Pin Land Grid Array Package, Body 2 x 2 mm, Pitch 0.5 mm", Package Reference=LGA-12, Bandwidth=400Hz, Contact Plating=Gold, Datasheet URL=http://www.st.com/content/ccc/resource/technical/document/datasheet/c9/16/f2/79/ca/31/47/89/DM00096789.pdf/files/DM00096789.pdf/jcr:content/translations/en.DM00096789.pdf, Datasheet Version="Rev. 5, 12/2015", Lead Free=LeadFree, Manufacturer URL=http://www.st.com/, Mount=SurfaceMount, Mounting Technology=SurfaceMount, Number of Pins=12, Packaging=TapeandReel, RoHSCompliant=true
U7: "Motor Driver Power MOSFET Parallel, PWM 10-QFN (2x2)", Built_By=EMA_UL_Team, Copyright="Copyright (C) 2018 Accelerated Designs. All rights reserved", Manufacturer_Part_Number=DRV2603RUNR, RefDes=RefDes, Type=DEV, Vendor="Texas Instruments"
U8: "FLASH - NOR Memory IC 32Mb (4M x 8) SPI 80MHz 8-SOP", Built_By=EMA_Cory, Copyright="Copyright (C) 2018 Accelerated Designs. All rights reserved", Manufacturer_Part_Number=MX25R3235FM1IL0, RefDes=RefDes, Type=DEV, Vendor=Macronix
X1: library part CMP-2000-07333-1, "MHz Range Crystal, 24 MHz, -40 to 85 degC, 4-Pin SMD, RoHS, Tape and Reel", Frequency=24MHz, Frequency Stability=10PPM, Load Capacitance=9pF, Manufacturer=Epson, Operating Temperature Range=-40Cto+85C, Package / Case=3.2mmx2.5mm, Package Description="4-Pin Surface Mount Device, Body 3.2 x 2.5 mm", Package Reference=TSX-3225, =X1G004001001012, Brand=EpsonTiming, Datasheet URL=https://support.epson.biz/td/api/doc_check.php?dl=brief_FA-238V_en.pdf, Datasheet Version=12/2015, Drive Level=200uW, ESR=40Ohms, Factory Pack Quantity=250, Height=0.6mm, Length=3.2mm, Manufacturer URL=https://www.eea.epson.com/, Mounting Style=SMD/SMT, Mounting Technology=SurfaceMount, Packaging=Reel, Product Category=Crystals, RoHS=True, Series=TSX-3225, Termination Style=SMD/SMT, Tolerance=10PPM, Type=Crystal, Unit Weight=0.000564oz, Width=2.5mm
X2: library part 9HT10-32.768KDZY-T, "TXC - 9HT10-32.768KDZY-T - CRYSTAL, 32.768KHZ, 7PF, 3.2 X 1.5MM", Case/Package=SMD/SMT, ESR (Equivalent Series Resistance)=70kR, Frequency Tolerance=20ppm, Load Capacitance=7pF, Manufacturer=TXC, Max Operating Temperature=85°C, Min Operating Temperature=-40°C, Package Quantity=1, Supplier Part Number 1=887-1506-1-ND, Category=Crystals, ComponentLink1Description=https://datasheet.ciiva.com/856/9ht10-856052.pdf?src-supplier=Digi-Key, ComponentLink1URL=https://datasheet.ciiva.com/856/9ht10-856052.pdf?src-supplier=Digi-Key, ComponentLink2Description=https://datasheet.ciiva.com/856/9ht10-856053.pdf?src-supplier=Digi-Key, ComponentLink2URL=https://datasheet.ciiva.com/856/9ht10-856053.pdf?src-supplier=Digi-Key, ComponentLink3Description=https://datasheet.ciiva.com/8047/9ht10-8047909.pdf?src-supplier=Element14, ComponentLink3URL=https://datasheet.ciiva.com/8047/9ht10-8047909.pdf?src-supplier=Element14, ComponentLink4Description=https://datasheet.ciiva.com/856/9ht10-856054.pdf?src-supplier=Digi-Key, ComponentLink4URL=https://datasheet.ciiva.com/856/9ht10-856054.pdf?src-supplier=Digi-Key, Frequency=32.768kHz, Height=0.033inch, Lead Free="Lead Free", Length=0.126inch, Manufacturer Part Number=9HT10-32.768KDZY-T, Mount="Surface Mount", Number of Pins=2, Packaging="Tape and Reel", Pricing 1="1=0.66000, 10=0.55000, 50=0.49500, 100=0.44000, 500=0.41800, 1000=0.35200 (USD)", REACH SVHC="No SVHC", RoHS=Yes, Stock 1=3909, Supplier 1=Digi-Key, Termination=SMD/SMT, Tolerance=20ppm, Width=1.5mm

## Via types
v1: diameter 25, hole 13, Top Layer to Bottom Layer, 60 vias
v2: diameter 35, hole 20, Top Layer to Bottom Layer, 3 vias
v3: diameter 30, hole 15, Top Layer to Bottom Layer, 1 vias

## Nets (pads, with @x,y where several pads share a name; then routed paths per layer and width w, separated by ;. In a path a pad name is that pad's centre, name@x,y a point inside that pad or via, vN(x,y) a via of type N, cw(c..) or ccw(c..) an arc to the next point about the centre after c; other vN are vias at no path point)
GND: C2.2 C3.2 C4.2 C5.2 C7.1 C8.1 C9.2 C10.1 C11.1 C12.1 C13.1 C14.1 C15.2 C16.1 C18.2 C19.2 C23.1 C24.2 C25.1 C26.2 J1.5 J1.Shell P1.2 P3.6 P4.2 R5.2 R6.1 R7.2 R14.2 R15.2 R16.1 RT1.2 U1.2 U2.3 U2.13 U3.17 U3.18 U3.33 U3.V U4.3 U4.4 U4.9 U4.10 U4.11 U4.21 U6.5 U6.6 U6.7 U6.8 U7.5 U7.8 U7.10 U8.4 X1.2 X1.4 | length 288.5
  Top Layer w10: U2.13 5795,4330 U2.3 ; U4.4 6086.38,4315.31 v1(6088.35,4313.35) ; U4.3 6066.69,4335 v1(6088.35,4356.65)
  Top Layer w15: C4.2 C4.2@5822.4,4524.92
  Bottom Layer w10: C14.1 5244.14,4125 5250,4130.86 5255,4135.86 v1(5255,4165) C15.2
  other v1: 4715,4045 4930,4050 5495,4185 5695,4190 4705,4240 5910,4250 6230,4260 6131.65,4313.35 5765,4320 5805,4320 5365,4330 6131.65,4356.65 6460,4360 5865,4485 5745,4525 5965,4530 5048.31,4558.5 4961.69,4621.5 5260,4640 5610,4730
NetAE1_1: AE1.1 C6.1 | length 41.5
  Top Layer w18: C6.1 AE1.1
NetC1_1: C1.1 R16.2 R17.1 U1.5 | length 158.8
  Top Layer w20: C1.1 5824.49,4565.2 5824.49,4604.8 R17.1 5824.84,4604.84 5864.84,4604.84 R16.2 5867.91,4607.6 U1.5
NetC6_2: C6.2 C7.2 L3.1 | length 75.3
  Top Layer w18: L3.1@4765,4515 4765,4550 C6.2@4765,4590.31
NetC8_2: C8.2 L3.2 L4.1 U3.1 | length 363.7
  Top Layer w12: L3.2 cw(c4765,4476.08) L3.2@4765.71,4476.08 ; L4.1 4905.12,4400.12 cw(c4915,4400.12) 4915,4410 4975,4410 cw(c4975,4405) 4980,4405 ccw(c4986.1,4405) 4986.1,4398.9 U3.1
  Top Layer w18: 4764.29,4425 4764.29,4400.71 ccw(c4785,4400.71) 4785,4380 L4.1 ; C8.2 L3.2@4765.71,4476.08
NetC12_2: C12.2 U3.4 X2.1 | length 457.9
  Top Layer w10: X2.1 4800,4245 4818.56,4263.56 v1(4818.56,4315.1) 4843.46,4340 5022.4,4340 U3.4
  Bottom Layer w10: C12.2 4800,4252.29 4818.56,4270.85 v1(4818.56,4315.1)
NetC13_2: C13.2 U3.5 X2.2 | length 368.3
  Top Layer w10: X2.2 4868,4236.5 4851.5,4220 v1(4825,4220) 4825,4246.35 4835,4256.35 4835,4278.07 4877.09,4320.16 U3.5
  Bottom Layer w10: v1(4825,4220) 4825,4217.29 4834.68,4207.61 4834.68,4192.2 4841.89,4185 C13.2
NetC15_1: C15.1 U3.12 | length 140
  Top Layer w10: U3.12 5110,4232.4 v1(5110,4169.06) v1@5115,4164.06
  Bottom Layer w10: v1(5110,4169.06) 5112.03,4167.03 5175.65,4167.03 C15.1
NetC16_2: C16.2 R3.1 U3.19 | length 157.5
  Top Layer w10: U3.19 5249.14,4300.47 5255,4294.61 5255,4250.86 5260.86,4245 5285.31,4245 5286.5,4243.82 5286.5,4206.18 C16.2@5287.68,4205
NetC17_1: C17.1 C20.1 P2.4 U5.11 | length 525.3
  Top Layer w10: C20.1 4181.52,4340.81 4218.48,4340.81 C17.1 4220,4365 4230,4375 4325,4375 4350,4400 v1(4350,4500)
  Bottom Layer w10: U5.11 v1(4350,4500) 4430,4500 P2.4
NetC17_2: C17.2 C20.2 C21.2 C22.2 P2.6 U5.4 U5.12 | length 726
  Top Layer w10: C20.2 4183.48,4304.19 4216.52,4304.19 C17.2 C21.2 4265.55,4295.16 4293.27,4295.16 C22.2 4306.57,4285 v1(4360,4285)
  Bottom Layer w10: U5.4 4235,4500 4266.5,4468.5 ; U5.12 4266.5,4468.5 ; P2.6 4445,4285 v1(4360,4285) 4275.71,4285 4266.5,4294.21 4266.5,4468.5
NetC21_1: C21.1 C22.1 P2.3 R8.2 R9.2 R10.1 U5.9 U5.10 | length 718.2
  Top Layer w10: C21.1 4302.28,4339.29 C22.1 4336.57,4336.57 4375,4375 4375,4526.86 4380.86,4532.72 R10.1 ; R9.2 4344.14,4530 4350,4535.86 v1(4350,4565) ; R8.2 v1(4350,4565) ; P2.3 4482.72,4532.72 R10.1 ; v1(4350,4565) 4394.14,4565 4400,4559.14 R10.1
  Bottom Layer w10: U5.10 4344.14,4531.5 4350,4537.35 v1(4350,4565) 4347.99,4562.99 U5.9
NetDS1_2: DS1.2 R15.1 | length 45.3
  Top Layer w20: DS1.2 6470.39,4459.61 6514.61,4459.61 R15.1
NetDS2_2: DS2.2 R12.1 | length 45.3
  Top Layer w10: DS2.2 DS2.2@6380.79,4459.21
  Top Layer w20: DS2.2@6380.79,4459.21 R12.1
NetDS3_2: DS3.2 R13.1 | length 40.3
  Top Layer w20: DS3.2 6290.39,4459.61 6329.61,4459.61 R13.1@6330,4459.21
NetL1_1: L1.1 U2.2 | length 73.2
  Top Layer w10: U2.2 5814.69,4428.78 L1.1
NetL2_1: L2.1 U1.3 | length 367.6
  Top Layer w20: L2.1 5790,4770 5805,4785 5995,4785 6028,4752 U1.3
NetL4_2: L4.2 U3.2 | length 78
  Top Layer w10: L4.2 5010.55,4380 5011.34,4379.21 U3.2
NetP2_1: P2.1 R9.1 U5.3 | length 752.8
  Top Layer w10: v1(4150,4485) 4150,4500 4180,4530 R9.1
  Bottom Layer w10: U5.3 4151.5,4468.5 4150,4470 v1(4150,4485) 4150,4635 4175,4660 4410,4660 P2.1
NetP2_2: P2.2 R8.1 U5.2 | length 578.8
  Top Layer w10: v1(4150,4435) 4148.09,4436.91 4138.09,4436.91 4125,4450 4125,4515 4175,4565 R8.1 4277.28,4592.28 4325,4640 P2.2
  Bottom Layer w10: v1(4150,4435) 4152.71,4435 4154.71,4437.01 U5.2
NetP2_5: P2.5 R10.2 U5.13 | length 341.4
  Top Layer w10: v1(4400,4450) R10.2
  Bottom Layer w10: U5.13 4382.01,4437.01 4392.13,4447.13 4393.07,4447.13 4395,4449.06 v1@4395,4450 ; v1(4400,4450) 4400,4350 4410,4340 P2.5
NetP3_1: P3.1 U3.26 | length 476.2
  Top Layer w10: U3.26 5169.23,4458.01 5361.21,4650 5455,4650 5480,4675 P3.1
NetP3_2: P3.2 U3.27 | length 388
  Top Layer w10: U3.27 5149.53,4459.53 5369.86,4679.86 5369.86,4709.86 P3.2
NetP3_5: P3.5 U3.8 | length 827.4
  Top Layer w10: v1(4900,4465) 4900,4720 4945,4765 5060,4765 5069.86,4755.14 5069.86,4730.14 P3.5 ; v1(4965,4245) 4987.62,4245 5003.21,4260.59 5022.05,4260.59 U3.8
  Bottom Layer w10: v1(4900,4465) 4900,4260 4915,4245 v1(4965,4245)
NetP4_1: P4.1 U3.9 | length 1065.6
  Top Layer w10: U3.9 5051.09,4201.09 5025,4175 5025,4080 5095,4010 5785,4010 5795,4020 P4.1@5795,4119.13
NetP4_3: P4.3 U7.9 | length 490.5
  Top Layer w10: U7.9 5665.47,4289.53 5755,4200 5975,4200 5995,4180 P4.3@5995,4111.46
NetP4_4: P4.4 U7.6 | length 669.4
  Top Layer w10: U7.6 5699.53,4230.47 5745,4185 5925,4185 5945,4165 5945,4060 5955,4050 6089.14,4050 6095,4055.86 P4.4
NetP5_1: P5.1 U3.13 | length 771
  Top Layer w10: U3.13 5129.85,4188.85 5140,4178.69 5140,4070 5185,4025 5639.14,4025 5645,4030.86 P5.1@5645,4108.99
NetP5_2: P5.2 U3.14 | length 629.9
  Top Layer w10: U3.14 5149.53,4195.47 5155,4190 5155,4080 5195,4040 5539.14,4040 5545,4045.86 P5.2@5545,4111.94
NetP5_3: P5.3 U3.15 | length 484.1
  Top Layer w10: U3.15 5169.74,4232.05 5169.74,4216.87 5170,4216.61 5170,4091.62 5206.62,4055 5439.14,4055 5445,4060.86 P5.3@5445,4111.13
NetP5_4: P5.4 U3.16 U7.2 | length 575.7
  Top Layer w10: U3.16 5188.91,4101.09 5215,4075 5310,4075 P5.4 5504.84,4269.84 U7.2
NetR1_2: R1.2 R14.1 U3.6 | length 2178.8
  Top Layer w10: v1(4960,4297.66) 4962.3,4299.96 5022.05,4299.96 U3.6 ; R1.2 6191.83,4491.52 6231.52,4491.52 v1@6233.35,4493.35
  Bottom Layer w10: v1(4960,4297.66) 4960,4465 4920,4505 4920,4740 4990,4810 6040,4810 6140,4710 6140,4555 6170,4525 6220.94,4525 6226.8,4519.14 6226.8,4499.89 v1(6228.35,4498.35) 6220,4490 6192.28,4490 R14.1
NetR4_2: R4.2 R7.1 U4.2 | length 91.7
  Top Layer w10: R4.2 R7.1 5972.95,4354.76 6029.21,4354.76 U4.2
NetR5_1: R5.1 U4.12 | length 89.9
  Top Layer w10: U4.12 6224.69,4315.31 v1(6240,4300)
  Bottom Layer w10: R5.1 v1(6240,4300)
NetR6_2: R6.2 U4.13 | length 86.8
  Top Layer w10: U4.13 6239.86,4335 v1(6240.05,4334.82)
  Bottom Layer w10: R6.2 6239.86,4335 v1(6240.05,4334.82)
NetR11_1: R11.1 U3.20 U4.6 | length 1008.6
  Top Layer w10: U3.20 5264.84,4320.16 ; R11.1@5285.16,4279.84 5283.06,4281.94 5283.06,4301.94 5264.84,4320.16 ; U4.6 6070.63,4230.63 6055,4215 5765,4215 5620,4360 5336.21,4360 5296.37,4320.16 5264.84,4320.16
NetR12_2: R12.2 U4.7 | length 566
  Top Layer w10: U4.7 6090.39,4254.21 6090.39,4219.61 6100,4210 6262.53,4210 6280,4227.47 6280,4384.14 6285.86,4390 6419.14,4390 6425,4395.86 R12.2
NetR13_2: R13.2 U4.8 | length 419.4
  Top Layer w10: U4.8 6110,4230.86 6115.86,4225 6255,4225 6265,4235 6265,4393.38 6291.54,4419.92 6329.92,4419.92 R13.2@6330,4419.84
NetRT1_1: RT1.1 U4.5 | length 100.1
  Top Layer w10: v1(5975,4285) 5977.71,4285 5988.34,4295.63 U4.5
  Bottom Layer w10: v1(5975,4285) 5976.71,4286.71 6013.29,4286.71 RT1.1
NetU3_7: U3.7 U6.12 | length 1496.1
  Top Layer w10: v1(4930,4270) 4980,4270 4990.79,4280.79 U3.7 ; v1(4940,4810) 5535,4810 5560,4785 5560,4680 5585,4655 5615,4655 5625.17,4644.83 U6.12
  Bottom Layer w10: v1(4930,4270) 4930,4460 4925,4465 4925,4475 4900,4500 4900,4770 v1(4940,4810)
NetU3_10: U3.10 U7.1 | length 696.6
  Top Layer w10: v1(5050,4165) 5070.77,4185.77 U3.10 ; v1(5255,4100) 5275,4100 5464.53,4289.53 U7.1
  Bottom Layer w10: v1(5050,4165) 5050,4125 5075,4100 v1(5255,4100)
NetU3_21: U3.21 U8.1 | length 481.2
  Top Layer w10: U3.21 5217.78,4339.5 5291.79,4339.5 5340,4387.71 v1(5340,4389.53)
  Bottom Layer w10: v1(5340,4389.53) 5525.47,4389.53 5590,4325 U8.1
NetU3_22: U3.22 U6.3 U8.2 | length 881
  Top Layer w10: U3.22 5274.53,4359.53 v1(5290,4375) ; v1(5280,4460) 5280,4485 5385.5,4590.5 5604.5,4590.5 U6.3
  Bottom Layer w10: v1(5280,4460) 5285.47,4454.53 5290,4450 v1(5290,4375) 5300.5,4364.5 5480.5,4364.5 5540,4305 U8.2
NetU3_23: U3.23 U6.4 U8.5 | length 603.6
  Top Layer w10: U3.23 5259.21,4379.21 5305,4425 5305,4488.79 5376.21,4560 5409.06,4560 5419.37,4570.31 U6.4
  Bottom Layer w10: v1(5405,4560) 5405,4555 5440,4520 U8.5
NetU3_24: U3.24 U6.2 | length 506.2
  Top Layer w10: U3.24 5217.44,4452.44 5373.87,4608.87 5604.19,4608.87 U6.2
NetU3_25: U3.25 U6.1 U8.6 | length 703.9
  Top Layer w10: U3.25 5188.91,4453.91 5364.37,4629.37 5470.31,4629.37 5485.94,4645 v1(5490,4645) 5494.06,4645 5509.69,4629.37 U6.1
  Bottom Layer w10: U8.6 5483.07,4481.93 5490,4488.86 v1(5490,4645)
NetU3_30: U3.30 X1.1 | length 231.9
  Top Layer w10: X1.1 5049.8,4620 5084.61,4620 5090.47,4614.14 U3.30
NetU3_31: U3.31 X1.3 | length 226
  Top Layer w10: X1.3 4961.69,4523.31 4970,4515 5055,4515 5070.77,4499.23 U3.31
V_1V8: C1.2 C4.1 C23.2 C24.1 C25.2 L2.2 P3.4 R17.2 U6.9 U6.10 | length 1135.6
  Top Layer w10: U6.9 5697.8,4609.69 C24.1@5705,4602.48 ; U6.10 5664.7,4629.37 5664.63,4629.45 5664.63,4677.7 C23.2 5690,4680 v1(5705,4665) C24.1@5705,4602.48 ; C24.1 C24.1@5705,4602.48 ; C25.2 C25.2@5746.34,4603.66 ; R17.2@5783.98,4603.66 R17.2
  Top Layer w15: C24.1 C25.2 ; C25.2@5746.34,4603.66 R17.2@5783.98,4603.66
  Top Layer w20: C4.1 5786.69,4525.98 5786.69,4564.02 C1.2 5785.51,4565.2 5785.51,4604.8 R17.2 5787.66,4607.34 5787.66,4657.81 L2.2
  Bottom Layer w10: P3.4 5181.5,4721.5 5181.5,4789.14 5187.35,4795 5677.53,4795 5705,4767.53 v1(5705,4665)
V_3V3: P3.3 U2.6 U7.3 U7.7 U8.8 | length 1366.5
  Top Layer w10: U7.3 5554.8,4250.16 5558.98,4254.33 5601.02,4254.33 5605.2,4250.16 5652.45,4250.16 5657.29,4255 v1(5660,4255) ; v1(5695,4385) 5728.17,4385 5735.94,4377.23 U2.6
  Bottom Layer w10: P3.3 5281.5,4721.5 5281.5,4774.14 5287.35,4780 5660,4780 5680,4760 5680,4655 5695,4640 v1(5695,4385) ; U8.8 5590,4395 5600,4385 v1(5695,4385) ; v1(5660,4255) 5695,4290 v1(5695,4385)
V_BAT: P1.1 R1.1 U4.14 U4.15 U4.16 | length 585.4
  Top Layer w10: U4.16 6149.45,4415.79 6149.45,4444.14 6155.31,4450 6189.69,4450 R1.1 6190.85,4449.47 6219.99,4449.47 6231.11,4438.35 v1(6233.35,4438.35) ; U4.14 6229.14,4354.69 6235,4360.54 6235,4390 ; U4.15 6219.37,4374.37 6235,4390 ; v1@6235,4430 6235,4390
  Bottom Layer w10: v1(6233.35,4438.35) 6235,4440 6345,4440 6375,4410 6375,4267.09 P1.1
V_MCU: C3.1 FB1.2 L1.2 U2.4 U2.5 | length 226.6
  Top Layer w10: L1.2@5745,4439.41 5755.63,4428.78 5755.63,4399.37 ; FB1.2@5745,4490 FB1.2@5747.42,4487.58 ; U2.5 5755.63,4399.37 ; U2.4 5775.31,4379.69 5755.63,4399.37 ; C3.1@5785.41,4487.58 C3.1
  Top Layer w15: L1.2@5745,4444.41 5745,4481.57 FB1.2@5745,4490 ; FB1.2@5747.42,4487.58 C3.1@5785.41,4487.58
V_SYS: C2.1 C19.1 C26.1 U1.1 U1.4 U2.1 U2.8 U2.9 U2.10 U2.11 U2.12 U4.1 U4.20 | length 1890.7
  Top Layer w10: U2.8 5755.63,4259.69 5765.16,4250.16 5785.16,4250.16 ; U2.9 5775.31,4260 5785.16,4250.16 ; U2.10 5795,4260.31 5805.16,4250.16 ; U2.11 5814.69,4260.63 5825.16,4250.16 ; U2.12 5834.37,4260.94 5845.16,4250.16 ; U2.1 5834.37,4382.05 5852.17,4399.84 5852.95,4399.84 C2.1@5860.16,4407.05 ; v1(5870,4525) 5890,4505 5890,4430 5875.83,4415.83 5867.36,4415.83 5860.16,4408.62 C2.1 C2.1@5860.16,4407.05 ; C19.1 6001.02,4390 6016.65,4374.37 U4.1 ; v2(5972.32,4439.14) 5979.09,4439.14 5984.95,4445 6064.69,4445 6070.55,4439.14 6070.55,4415.79 U4.20 ; 5785.16,4250.16 5805.16,4250.16 ; 5805.16,4250.16 5825.16,4250.16 ; 5825.16,4250.16 5845.16,4250.16 ; 5845.16,4250.16 5865.16,4250.16 5880.16,4265.16 5880.16,4387.05 C2.1@5860.16,4407.05
  Top Layer w20: C26.1 v2(5855,4725) ; C26.1@5865,4682.32 5865.04,4682.36 5940.96,4682.36 U1.4@5941,4682.4 ; C19.1 v2(5972.32,4439.14) ; U1.1 6029,4606.6 6103.4,4606.6 v2(6105,4605)
  Bottom Layer w10: v2(5855,4725) 5855,4540 v1(5870,4525)
  Bottom Layer w20: v2(5855,4725) 6075,4725 6105,4695 v2(6105,4605) 6105,4545 5999.32,4439.32 5972.5,4439.32 v2(5972.32,4439.14)
V_USB: C18.1 DS1.1 DS2.1 DS3.1 J1.1 R4.1 U4.17 U4.18 U4.19 | length 1064
  Top Layer w10: R4.1 5938.64,4318.64 5938.64,4286.36 v1(5940,4285) ; U4.19 6090.31,4444.14 6096.17,4450 6110,4450 ; U4.18 6110,4450 ; C18.1 C18.1@6113.15,4475.83 ; U4.17 6129.69,4444.14 6123.83,4450 6110,4450
  Top Layer w15: 6110,4450 C18.1@6110,4472.32
  Top Layer w20: C18.1@6110,4472.8 6110.91,4472.8 6115.31,4477.2 6115.31,4497.61 6129.82,4512.12 v3(6129.82,4514.82) ; v3@6130,4515 6165,4550 6290,4550 ; DS3.1 6290,4550 ; DS2.1@6370,4519.06 6370,4545 6365,4550 ; J1.1 6405.04,4619.69 6405.04,4597.76 6405,4597.72 6405,4560.53 ; 6450,4519.06 6450,4540 6440,4550 6417.9,4550 6406.18,4561.72 6405,4560.53 ; 6290,4550 6365,4550 ; 6365,4550 6394.47,4550 6405,4560.53
  Bottom Layer w10: v1(5940,4285) 5938.64,4286.36 5938.64,4348.64 6101.29,4511.29 6126.29,4511.29 v3(6129.82,4514.82)
VDDR: C5.1 C9.1 C10.2 C11.2 C14.2 FB1.1 R3.2 R11.2 U3.11 U3.28 U3.29 U3.32 | length 2080.7
  Top Layer w10: v1@5021.91,4488.09 v1(5020,4490) 5043.31,4490 5051.09,4482.23 U3.32 ; v1(5085,4130) 5085,4180 5090,4185 5090,4232.09 U3.11 ; U3.29 5110.15,4491.1 5115,4495.94 v1(5115,4500) ; U3.28 5129.85,4474.85 5155,4500 v1(5155,4502.5) ; R3.2@5324.69,4245 R11.2 5324.84,4280.16 5324.84,4314.84 v1(5325,4315) ; v1(5340,4490) 5365,4490 5410,4535 5687.57,4535 5693.43,4529.14 FB1.1
  Bottom Layer w12: v1(5020,4490) 5020,4520 5027.32,4527.32 C9.1 5065,4528.11 5079.57,4542.68 C11.2 ; v1@5084.06,4130 C14.2@5177.68,4130 ; v1(5085,4130) 5085,4187.97 5092.03,4195 5305,4195 5325,4215 v1(5325,4315) 5260,4315 5250,4325 5250,4475 5265,4490 ; v1(5115,4500) C11.2 ; v1(5155,4502.5) C10.2 ; v1(5340,4490) 5265,4490 ; C11.2 C10.2 ; C10.2 5156.52,4544.19 5198.48,4544.19 C5.1 5200,4520 5217.5,4502.5 5252.5,4502.5 5265,4490
pads on no net: AE1.2 J1.2 J1.3 J1.4 J1.MH1 J1.MH2 U2.7 U3.3 U5.1 U5.5 U5.6 U5.7 U5.8 U5.14 U6.11 U7.4 U8.3 U8.7

## Polygon pours and split planes (outlines as drawn)
GND on Bottom Layer "NONET_L02_P010" (solid, remove dead copper, shelved, pour order 10): 6555,4845 6555,3980 4650,3980 4650,4345 4885,4345 4885,4845
GND on Top Layer "Top Layer-GND1" (solid, shelved, pour order 13): 4650,3980 6555,3980 6555,4845 4885,4845 4885,4610 4650,4610

## Keep-outs
Keep-Out Layer:
  the board outline again, w10

## Text inside footprints (layer, text, board x,y; h text height)
FB1: Mechanical 6 "Land Pattern Adapted for Reflow Soldering" at 5680.63,4508.62 h1.97
J1: Mechanical 2 "PCB Edge" at 6406.18,4864.92 h16 r180
P2: Top Overlay "1" at 4400,4755 h40 r180; Top Overlay "6" at 4415,4250 h40 r180
P3: Top Overlay "6" at 4990,4815 h40 r270; Top Overlay "1" at 5460,4810 h40 r270
U1: Top Overlay "*" at 6050.5,4590.6 h50 r180; Mechanical 13 "*" at 6050.5,4590.6 h50 r180; Mechanical 7 "0.024in/0.61mm" at 6115.5,4822 h25 r180; Mechanical 7 "0.075in/1.9mm" at 5822,4657.5 h25 r180; Mechanical 7 "0.037in/0.95mm" at 6323,4638.8 h25 r180; Mechanical 7 "0.114in/2.896mm" at 5633.5,4657.5 h25 r180; Mechanical 7 "0.11in/2.794mm" at 6072.5,4418 h25 r180; Mechanical 7 "0.063in/1.6mm" at 6066.25,4493 h25 r180; Mechanical 7 "Alt 2 Padstyle: OX90Y60D30P" at 6322.5,5142 h50 r180; Mechanical 7 "Alt 1 Padstyle: OX60Y90D30P" at 6322.5,5082 h50 r180; Mechanical 7 "Pin One Padstyle: RX52Y22D0TSM2" at 6150,5110 h50 r180; Mechanical 7 "Default Padstyle: RX52Y22D0TSM2" at 6372.5,4902 h50 r180
U3: Top Overlay "*" at 4955,4420 h50; Mechanical 13 "*" at 5036.79,4383.74 h50; Mechanical 7 "0.203in/5.15mm" at 5032.5,4051.73 h25; Mechanical 7 "0.203in/5.15mm" at 4691.73,4317.5 h25; Mechanical 7 "0.195in/4.95mm" at 5423.27,4317.5 h25; Mechanical 7 "0.195in/4.95mm" at 5032.5,4633.27 h25; Mechanical 7 "0.02in/0.5mm" at 5348.27,4376.56 h25; Mechanical 7 "Alt 2 Padstyle: OX90Y60D30P" at 4782.5,3731.73 h50; Mechanical 7 "Alt 1 Padstyle: OX60Y90D30P" at 4782.5,3791.73 h50; Mechanical 7 "Via Padstyle: EX20Y20D10P" at 4807.5,3851.73 h50; Mechanical 7 "Heat Tab Padstyle: RX135p83Y135p83D0T" at 4657.5,3911.73 h50; Mechanical 7 "Default Padstyle: RX11p02Y33p46D0T" at 4695,3971.73 h50
U5: Mechanical 7 "0.114in/2.896mm" at 4156.25,4757 h25 r180; Mechanical 7 "0.224in/5.69mm" at 4421,4512.5 h25 r180; Mechanical 7 "0.031in/0.8mm" at 3916.5,4433.76 h25 r180; Mechanical 7 "0.02in/0.508mm" at 4115.5,4285.51 h25 r180; Mechanical 7 "0.114in/2.896mm" at 4156.25,4135.51 h25 r180; Mechanical 7 "Alt 2 Padstyle: OX90Y60D30P" at 3912.5,5222 h50 r180; Mechanical 7 "Alt 1 Padstyle: OX60Y90D30P" at 3912.5,5162 h50 r180; Mechanical 7 "Default Padstyle: RX28Y10D0T" at 5390,5015 h50 r180
U7: Top Overlay "*" at 5495,4325 h20; Mechanical 13 "*" at 5557.81,4274.37 h50; Mechanical 7 "Default Padstyle: RX11p02Y37p4D0T" at 5167.5,3958.82 h50; Mechanical 7 "Alt 1 Padstyle: RX13p78Y24p8D10P" at 5180,3778.82 h50; Mechanical 7 "Alt 2 Padstyle: RX9p84Y22p83D10P" at 5180,3718.82 h50; Mechanical 7 "0.02in/0.5mm" at 5751.18,4267.19 h25; Mechanical 7 "0.077in/1.95mm" at 5492.5,4506.18 h25; Mechanical 7 "0.077in/1.95mm" at 5826.18,4247.5 h25; Mechanical 7 "0.083in/2.1mm" at 5221.32,4247.5 h25; Mechanical 7 "0.083in/2.1mm" at 5498.75,4038.82 h25
U8: Mechanical 13 "*" at 5561,4294 h50 r270; Mechanical 7 "0.034in/0.864mm" at 5296,4171.25 h25 r270; Mechanical 7 "0.05in/1.27mm" at 5552.5,3982.5 h25 r270; Mechanical 7 "0.198in/5.029mm" at 5502.5,4568.5 h25 r270; Mechanical 7 "0.244in/6.198mm" at 5784,4276.25 h25 r270; Mechanical 7 "0.157in/3.988mm" at 5709,4276.25 h25 r270; Mechanical 7 "Alt 2 Padstyle: OX90Y60D30P" at 4916,4032.5 h50 r270; Mechanical 7 "Alt 1 Padstyle: OX60Y90D30P" at 4976,4032.5 h50 r270; Mechanical 7 "Pin One Padstyle: RX62Y22D0T" at 5660,4465 h50 r270; Mechanical 7 "Default Padstyle: RX62Y22D0T" at 5216,4020 h50 r270; Bottom Overlay "*" at 5607,4242.5 h50 r270